# Altium PCB NEWAS5048B.PcbDoc
Units mil, origin at the board's own origin, x right, y up, seen from the top; angles counter-clockwise.
Board outline 6000 x 4000 mil, 2 copper layers (Top Layer, Bottom Layer), stack 72.485 mil thick; 6 components, 5 nets, 28 pads, 1 vias.
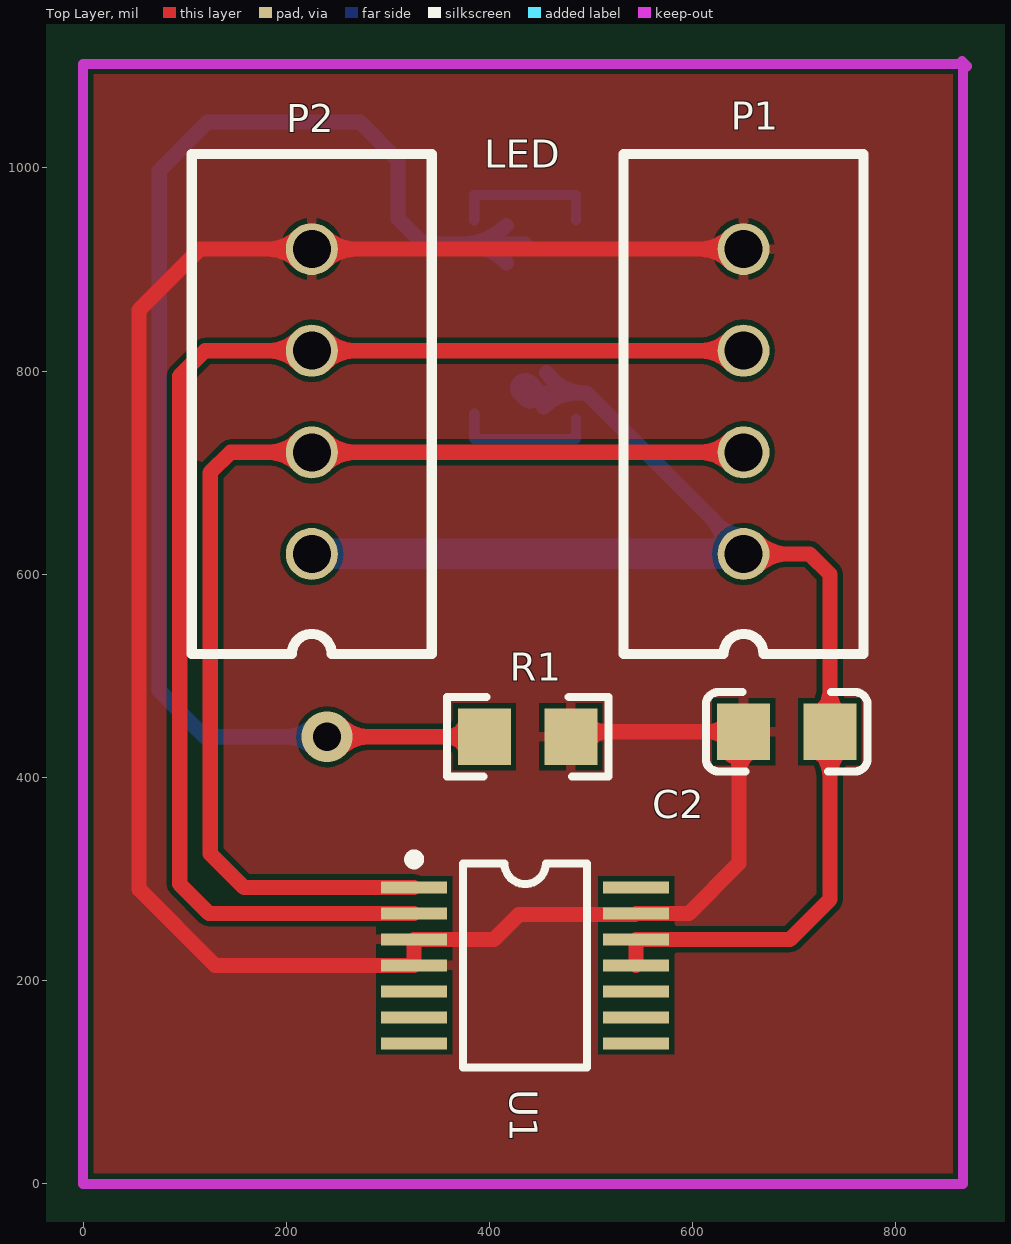
[diagram p0: Top Layer view]
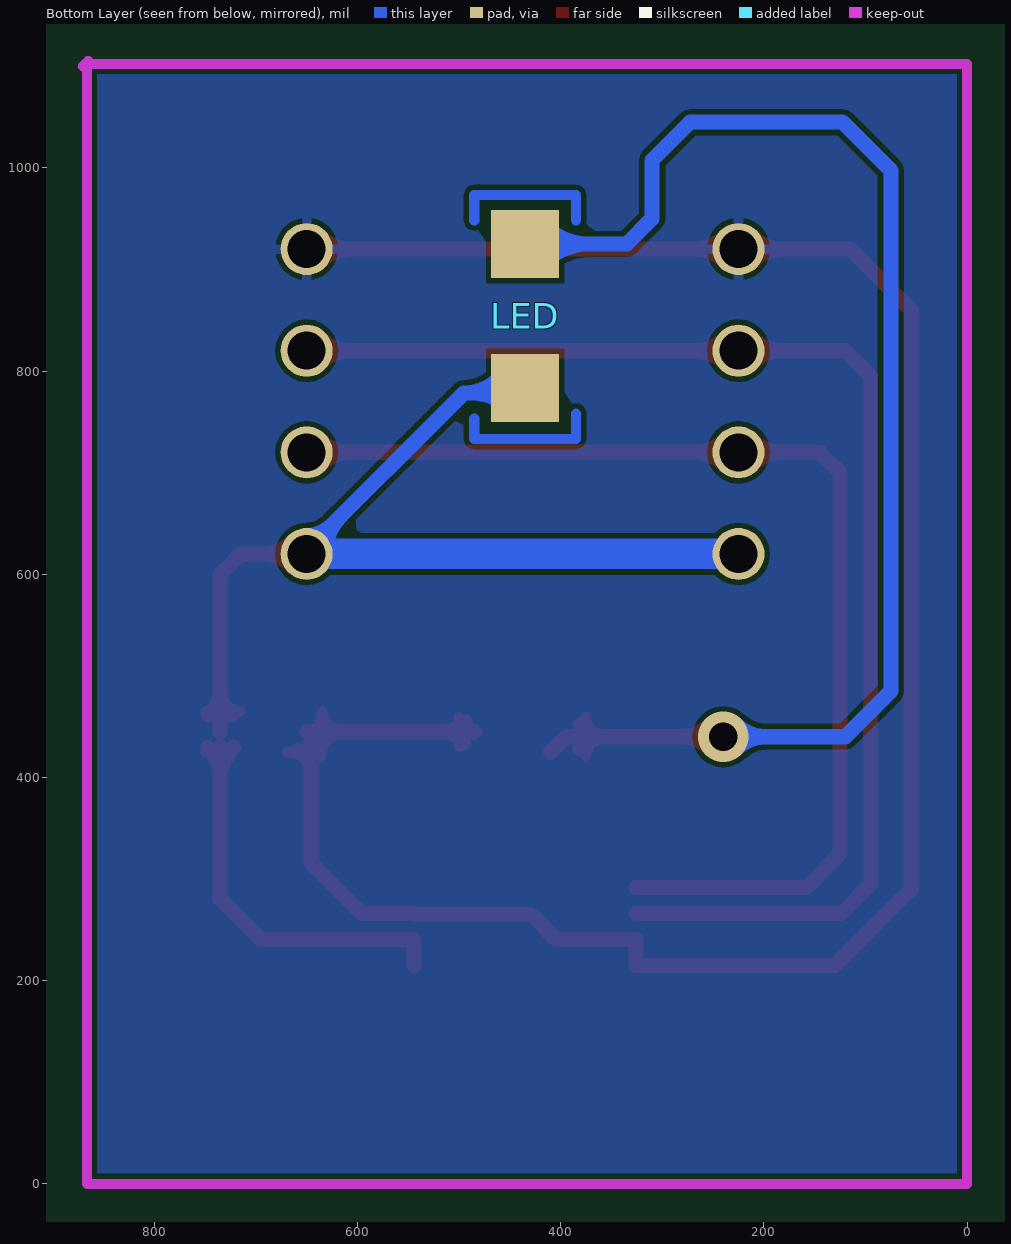
[diagram p1: Bottom Layer view, seen from below]

## Layer stack, top to bottom
Top Layer: signal copper 1.4
Dielectric: core 69.685, FR-4, Dk 4.8
Bottom Layer: signal copper 1.4

## Board outline
-2550,-1785 3450,-1785 3450,2215 -2550,2215

## Design rules (kind name [scope] priority, off if disabled: settings)
Clearance [All] p1: gap=5
FabricationTestPointUsage TestPointUsage [All] p1: valid=0 allowmultiple=FALSE
FabricationTestpoint Testpoint [All] p1: side=3 testpointundercomponent=TRUE minsize=40 maxsize=100 preferedsize=60 minholesize=0 maxholesize=40 preferedholesize=32 testpointgrid=1 allowsidetop=TRUE allowsidebottom=TRUE usegrid=TRUE gridtolerance=0.01
MinimumSolderMaskSliver [All] p1 off: minsoldermaskwidth=10
PolygonConnect [All] p1: connectstyle=Relief reliefconductorwidth=10 reliefentries=4 polygonreliefangle="90 Angle"
RoutingVias [All] p1: holewidth=28 width=50 viastyle="Through Hole" minholewidth=28 minwidth=50 maxholewidth=28 maxwidth=50
SilkscreenOverComponentPads [All] p1 off: minsilkscreentomaskgap=10
SolderMaskExpansion [All] p1: expansion=4
Width VCC [InNet('VCC')] p1: maxlimit=40 minlimit=10 preferedwidth=10
Width GND [InNet('GND')] p2: maxlimit=40 minlimit=10 preferedwidth=10
Width [All] p3: maxlimit=40 minlimit=10 preferedwidth=10
24 further rules are at their usual default settings.

## Components (designator, comment, footprint, x,y, rotation, side; value= is the part's Value field where it differs from the comment)
C2 "Cap" 0805C 650,445 r0 top
LED "LED0" D0 435,783.27 r90 top (schematic designator D0)
P1 "Header 4" PCBComponent_1 650,620 r90 top
P2 "Header 4" PCBComponent_1 225,620 r90 top
R1 "Res1" 0805R 480,440 r180 top
U1 "as5048" TSSOP14 435,215 r270 top

## Footprints (in the part's own frame and the unit in brackets; to place one, negate y for a bottom-side part, rotate by r counter-clockwise, add the part's x,y. Pads: shape width x height; smd on the part's side, far side on the other; paste and mask are expansions set on the pad)
0805C [mil]
  rect 52x56 smd: 1(0,0) 2(85,0)
  silkscreen extent -37,-39 122,39
0805R [mil]
  rect 52x56 smd: 1(0,0) 2(85,0)
  silkscreen extent -37,-39 122,39
D0 [mm]
  rect 1.7x1.7 smd far side: 1(0,0) 2(3.6,0)
  Bottom Layer lines w0.254: -0.635,1.27 -1.27,1.27 -1.27,-1.27 -0.762,-1.27 ; 4.191,1.27 4.826,1.27 4.826,-1.27 4.191,-1.27
PCBComponent_1 [mm]
  round 1.3 hole 0.95: 1(0,0) 2(2.54,0) 3(5.08,0) 4(7.62,0)
  silkscreen extent -2.5,-3 10,3
TSSOP14 [mm] "Shrink Small Outline; 14 Leads; Body Width 4.4 mm; Pitch 0.65 mm"
  rect 0.3x1.65 smd: 1(-1.95,-2.775) 2(-1.3,-2.775) 3(-0.65,-2.775) 4(0,-2.775) 5(0.65,-2.775) 6(1.3,-2.775) 7(1.95,-2.775) 8(1.95,2.775) 9(1.3,2.775) 10(0.65,2.775) 11(0,2.775) 12(-0.65,2.775) 13(-1.3,2.775) 14(-1.95,2.775)
  silkscreen extent -2.77,-2.9 2.55,1.55

## Part data
C2: "Capacitor"
LED: "Typical INFRARED GaAs LED"
P1 P2: library part Hea
R1: "Resistor"

## Via types
v1: diameter 50, hole 28, Top Layer to Bottom Layer, 1 vias

## Nets (pads, with @x,y where several pads share a name; then routed paths per layer and width w, separated by ;. In a path a pad name is that pad's centre, name@x,y a point inside that pad or via, vN(x,y) a via of type N, cw(c..) or ccw(c..) an arc to the next point about the centre after c; other vN are vias at no path point)
GND: C2.1 P1.4 P2.4 R1.1 U1.3 U1.4 U1.13 | length 3427
  Top Layer w10: R1.1@500,430 cw(c517.5,427.5) 515,445 ; R1.1@500,460 ccw(c515,460) 515,445 ; 520,445 ccw(c517.5,427.5) 515,445 ; U1.13@543.07,265 U1.13 ; 605,445 ccw(c610,470) 611.2,444.53 ; C2.1@635,425 ccw(c612.5,422.5) 620.46,443.69 ; C2.1@635,455 cw(c617.5,462.5) 625,445 cw(c617.5,462.5) 620.46,443.69 ; C2.1@635,465 cw(c610,470) 615,445 ; C2.1@636.3,419.77 cw(c629.1,401.97) 645.61,411.78 cw(c629.1,401.97) 646.91,409.16 ; 645.61,414.39 cw(c627.8,407.2) 646.91,409.16 ; C2.1@670,425 ccw(c669.2,401.4) 646.91,409.16 ; 611.2,444.53 cw(c617.5,462.5) 610,445 cw(c612.5,422.5) 615,445 ; 611.2,444.53 ccw(c617.5,462.5) 620.46,443.69 ; 611.2,444.53 ccw(c610,470) 615,445 ; 615,445 cw(c612.5,422.5) 620.46,443.69 ; 645.61,400 ccw(c627.8,402.2) 645.66,400.48 ; 645.61,400 cw(c667.8,397.8) 645.66,400.48 ; 645.61,400 ccw(c627.8,407.2) 646.91,409.16 ; 645.61,400 645.61,402.2 ; 645.61,402.2 cw(c669.2,401.4) 645.69,403.55 ; 645.61,402.2 645.61,404.39 cw(c627.8,402.2) 645.69,403.55 ; 645.66,400.48 ccw(c627.8,402.2) 645.69,403.55 ; 645.69,403.55 cw(c669.2,401.4) 646.91,409.16
  Top Layer w15: R1.1@485,445 515,445 ; U1.13@543.07,265 428.82,265 404.41,240.59 U1.3 U1.4 130,215 55,290 55,860 115,920 P2.4 P1.4 ; U1.13 596.18,266.18 645.61,315.61 645.61,400 ; 645.61,404.39 645.61,411.78 645.61,414.39 C2.1@645.61,434.39 ; C2.1 625,445 615,445 ; 181.33,920 ccw(c181.33,963.67) 212.21,932.79 cw(c181.33,963.67) 181.33,920 ; 181.33,920 cw(c181.33,876.33) 212.21,907.21 ccw(c181.33,876.33) 181.33,920 ; 268.67,920 ccw(c268.67,876.33) 237.79,907.21 cw(c268.67,876.33) 268.67,920 ; 268.67,920 cw(c268.67,963.67) 237.79,932.79 ccw(c268.67,963.67) 268.67,920 ; 515,445 ccw(c515,424.26) 496.5,433.64 cw(c515,424.26) 515,445 ; 515,445 cw(c515,473.76) 493.7,454.43 ccw(c515,473.76) 515,445 ; 515,445 605,445 610,445 615,445 ; 606.33,920 ccw(c606.33,963.67) 637.21,932.79 cw(c606.33,963.67) 606.33,920 ; 606.33,920 cw(c606.33,876.33) 637.21,907.21 ccw(c606.33,876.33) 606.33,920 ; 615,445 ccw(c615,468.86) 634.71,455.42 cw(c615,468.86) 615,445 ; 615,445 cw(c615,421.14) 634.71,434.58 ccw(c615,421.14) 615,445 ; C2.1@637.67,429.21 cw(c621.83,411.48) 645.61,411.48 ; C2.1@637.67,429.21 cw(c621.83,411.48) 645.61,411.48 ; C2.1@637.67,429.21 cw(c621.83,411.48) 645.61,411.48 ; C2.1@637.67,429.21 cw(c621.83,411.48) 645.61,411.48 ; C2.1@638.6,428.43 cw(c627.37,414.06) 645.61,414.06 ; C2.1@638.6,428.43 cw(c627.37,414.06) 645.61,414.06 ; C2.1@638.6,428.43 cw(c627.37,414.06) 645.61,414.06 ; C2.1@638.6,428.43 cw(c627.37,414.06) 645.61,414.06 ; 645.47,413.43 ccw(c630.46,415.59) 639.26,427.94 cw(c630.46,415.59) 645.47,413.43 ; 645.47,413.43 cw(c660.02,411.35) 655.58,425.36 ccw(c660.02,411.35) 645.47,413.43 ; 645.61,411.48 cw(c660.26,411.48) C2.1@655.72,425.41 ; 645.61,411.48 cw(c660.26,411.48) C2.1@655.72,425.41 ; 645.61,411.48 cw(c660.26,411.48) C2.1@655.72,425.41 ; 645.61,411.48 cw(c660.26,411.48) C2.1@655.72,425.41 ; 645.61,414.06 cw(c656.85,414.06) C2.1@654.26,425 ; 645.61,414.06 cw(c656.85,414.06) C2.1@654.26,425 ; 645.61,414.06 cw(c656.85,414.06) C2.1@654.26,425 ; 645.61,414.06 cw(c656.85,414.06) C2.1@654.26,425 ; C2.1@636.92,429.92 cw(c615.94,408.94) 645.61,408.94 ccw(c615.94,408.94) C2.1@636.92,429.92 ; 645.61,404.15 cw(c671.52,404.15) 658.97,426.82 ccw(c671.52,404.15) 645.61,404.15
NetD0_2: LED.2 R1.2 | length 1813.1
  Top Layer w10: 355,440 ccw(c355,460) 355.06,440 ; R1.2@375,420 ccw(c355.03,420.03) 355.09,440 ccw(c355,460) R1.2@375,460
  Top Layer w15: v1(240,440) 355.06,440 ; R1.2@410,425 R1.2 355.09,440 ; 282.25,440 ccw(c282.25,397.75) 252.37,427.63 cw(c282.25,397.75) 282.25,440 ; 282.25,440 cw(c282.25,482.25) 252.37,452.37 ccw(c282.25,482.25) 282.25,440 ; 355.1,440 ccw(c355.1,473.78) 380.88,451.95 cw(c355.1,473.78) 355.1,440 ; 355.1,440 cw(c355.1,406.22) 380.88,428.05 ccw(c355.1,406.22) 355.1,440
  Bottom Layer w15: v1@227.63,427.63 ccw(c197.75,397.75) 197.75,440 ccw(c197.75,482.25) v1@227.63,452.37 ; v1(240,440) 120,440 75,485 75,997.5 122.5,1045 272.5,1045 310,1007.5 310,950 335,925 LED.2 ; LED.2@416.64,906.64 ccw(c372.32,862.32) 372.32,925 ccw(c372.32,987.68) LED.2@416.64,943.36
SCL: P1.3 P2.3 U1.2 | length 1719.7
  Top Layer w15: U1.2 123.82,266.18 95,295 95,795 120,820 P2.3 P1.3 ; 181.33,820 ccw(c181.33,863.67) 212.21,832.79 cw(c181.33,863.67) 181.33,820 ; 181.33,820 cw(c181.33,776.33) 212.21,807.21 ccw(c181.33,776.33) 181.33,820 ; 268.67,820 ccw(c268.67,776.33) 237.79,807.21 cw(c268.67,776.33) 268.67,820 ; 268.67,820 cw(c268.67,863.67) 237.79,832.79 ccw(c268.67,863.67) 268.67,820 ; 606.33,820 ccw(c606.33,863.67) 637.21,832.79 cw(c606.33,863.67) 606.33,820 ; 606.33,820 cw(c606.33,776.33) 637.21,807.21 ccw(c606.33,776.33) 606.33,820
SDA: P1.2 P2.2 U1.1 | length 1534.4
  Top Layer w15: U1.1 158.23,291.77 125,325 125,700 145,720 P2.2 P1.2 ; 181.33,720 ccw(c181.33,763.67) 212.21,732.79 cw(c181.33,763.67) 181.33,720 ; 181.33,720 cw(c181.33,676.33) 212.21,707.21 ccw(c181.33,676.33) 181.33,720 ; 268.67,720 ccw(c268.67,676.33) 237.79,707.21 cw(c268.67,676.33) 268.67,720 ; 268.67,720 cw(c268.67,763.67) 237.79,732.79 ccw(c268.67,763.67) 268.67,720 ; 606.33,720 ccw(c606.33,763.67) 637.21,732.79 cw(c606.33,763.67) 606.33,720 ; 606.33,720 cw(c606.33,676.33) 637.21,707.21 ccw(c606.33,676.33) 606.33,720
VCC: C2.2 LED.1 P1.1 P2.1 U1.11 U1.12 | length 2976.4
  Top Layer w10: C2.2@715,465 ccw(c712.5,487.5) 734.38,481.7 ; C2.2@725,420 cw(c725,410) 735,410 ; C2.2@725,465 ccw(c720,480) 735,475 ccw(c720,480) 735.59,477.35 ; 735,400 cw(c755,405) 735,410 ; 735,405 cw(c752.5,407.5) 735,410 ; 735,490 cw(c712.5,487.5) 735,485 ; 735,500 ccw(c760,490) 734.38,481.7 ; 734.38,481.7 ccw(c760,490) 735,480 ; 734.38,481.7 ccw(c712.5,487.5) 734.92,484.38 ; 734.92,484.38 ccw(c752.5,482.5) 735,480 ; 734.92,484.38 ccw(c752.5,482.5) 735,480 ; 734.92,484.38 ccw(c712.5,487.5) 735,485 ; 734.92,484.38 cw(c752.5,482.5) 735,485 ; 734.92,484.38 cw(c752.5,482.5) 735,485 ; 735,410 cw(c750,410) C2.2@750,425 ; 735,410 cw(c752.5,407.5) C2.2@750,425 ; 735,410 cw(c755,405) C2.2@750,425 ; 735,480 ccw(c752.5,482.5) 735.59,477.35 ; 735,480 ccw(c752.5,482.5) 735.59,477.35 ; 735,480 ccw(c760,490) 735.73,478.35 ; 735,485 cw(c720,480) 735.73,478.35 ; 735.59,477.35 ccw(c720,480) 735.73,478.35 ; 735.59,477.35 ccw(c752.5,482.5) C2.2@750,465 ; 735.59,477.35 ccw(c752.5,482.5) C2.2@750,465 ; 735.73,478.35 ccw(c760,490) C2.2@750,465
  Top Layer w15: U1.11 U1.12 695.59,240.59 735,280 735,400 ; P1.1 715,620 735,600 735,500 735,490 735,485 ; C2.2@735,430 735,410 ; C2.2 735,475 ; 693.67,620 ccw(c693.67,576.33) 662.79,607.21 cw(c693.67,576.33) 693.67,620 ; 693.67,620 cw(c693.67,663.67) 662.79,632.79 ccw(c693.67,663.67) 693.67,620 ; C2.2@725.35,427.22 cw(c714.82,410) 735,410 ; C2.2@725.35,427.22 cw(c714.82,410) 735,410 ; C2.2@725.35,427.22 cw(c714.82,410) 735,410 ; C2.2@725.35,427.22 cw(c714.82,410) 735,410 ; C2.2@725.35,427.22 cw(c714.82,410) 735,410 ; C2.2@725.35,427.22 cw(c714.82,410) 735,410 ; C2.2@725.35,462.78 ccw(c714.82,480) 735,480 ; C2.2@725.35,462.78 ccw(c714.82,480) 735,480 ; C2.2@725.35,462.78 ccw(c714.82,480) 735,480 ; C2.2@725.35,462.78 ccw(c714.82,480) 735,480 ; C2.2@725.35,462.78 ccw(c714.82,480) 735,480 ; C2.2@725.35,462.78 ccw(c714.82,480) 735,480 ; C2.2@725.35,462.78 ccw(c714.82,480) 735,480 ; C2.2@725.35,462.78 ccw(c714.82,480) 735,480 ; C2.2@725.35,462.78 ccw(c714.82,480) 735,480 ; C2.2@725.35,462.78 ccw(c714.82,480) 735,480 ; C2.2@725.35,462.78 ccw(c714.82,480) 735,480 ; C2.2@725.35,462.78 ccw(c714.82,480) 735,480 ; C2.2@727.74,464.02 ccw(c723.06,475) 735,475 ; C2.2@727.74,464.02 ccw(c723.06,475) 735,475 ; C2.2@727.74,464.02 ccw(c723.06,475) 735,475 ; C2.2@727.74,464.02 ccw(c723.06,475) 735,475 ; 735,400 ccw(c694.28,400) 722.28,429.57 cw(c694.28,400) 735,400 ; 735,400 cw(c775.72,400) 747.72,429.57 ccw(c775.72,400) 735,400 ; 735,400 735,410 ; 735,410 cw(c755.18,410) C2.2@744.65,427.22 ; 735,410 cw(c755.18,410) C2.2@744.65,427.22 ; 735,410 cw(c755.18,410) C2.2@744.65,427.22 ; 735,410 cw(c755.18,410) C2.2@744.65,427.22 ; 735,410 cw(c755.18,410) C2.2@744.65,427.22 ; 735,410 cw(c755.18,410) C2.2@744.65,427.22 ; 735,475 ccw(c746.94,475) C2.2@742.26,464.02 ; 735,475 ccw(c746.94,475) C2.2@742.26,464.02 ; 735,475 ccw(c746.94,475) C2.2@742.26,464.02 ; 735,475 ccw(c746.94,475) C2.2@742.26,464.02 ; 735,475 735,480 ; 735,480 ccw(c755.18,480) C2.2@744.65,462.78 ; 735,480 ccw(c755.18,480) C2.2@744.65,462.78 ; 735,480 ccw(c755.18,480) C2.2@744.65,462.78 ; 735,480 ccw(c755.18,480) C2.2@744.65,462.78 ; 735,480 ccw(c755.18,480) C2.2@744.65,462.78 ; 735,480 ccw(c755.18,480) C2.2@744.65,462.78 ; 735,480 ccw(c755.18,480) C2.2@744.65,462.78 ; 735,480 ccw(c755.18,480) C2.2@744.65,462.78 ; 735,480 ccw(c755.18,480) C2.2@744.65,462.78 ; 735,480 ccw(c755.18,480) C2.2@744.65,462.78 ; 735,480 ccw(c755.18,480) C2.2@744.65,462.78 ; 735,480 ccw(c755.18,480) C2.2@744.65,462.78 ; 735,480 735,485 ; 735,485 ccw(c764.77,485) 746.41,461.56 cw(c764.77,485) 735,485 ; 735,485 cw(c705.23,485) 723.59,461.56 ccw(c705.23,485) 735,485
  Bottom Layer w15: LED.1@440,778.27 495.36,778.27 ; LED.1@453.36,764.91 cw(c485.61,732.65) 485.61,778.27 ; LED.1@456.09,798.41 ccw(c495.35,826.6) 495.35,778.27 ; 616.56,657.07 cw(c579.49,620) P1.1@631.91,620 ; 625.3,648.32 ccw(c650,673.02) P1.1@650,638.09 ; P1.1@650,623.62 495.36,778.27
  Bottom Layer w30: P2.1 P1.1 ; LED.1 LED.1@440,778.27
pads on no net: U1.5 U1.6 U1.7 U1.8 U1.9 U1.10 U1.14

## Polygon pours and split planes (outlines as drawn)
GND on Bottom Layer "Top Layer-No Net" (solid, pour order 4): 0,1102.36 0,0 866.14,0 866.14,1102.36 0,1102.36
GND on Top Layer "Top Layer-No Net" (solid, pour order 6): 0,1102.36 0,0 866.14,0 866.14,1102.36 0,1102.36

## Keep-outs
Keep-Out Layer:
  lines w10: 865,1105 870,1100 ; 0,0 866.14,0 866.14,1102.36 0,1102.36 0,0